# Altium PCB MicroD_MEC5_Adapter.PcbDoc
Units mm, origin at the board's own origin, x right, y up, seen from the top; angles counter-clockwise.
Board outline 25.4 x 24.5 mm, 2 copper layers (Top Layer, Bottom Layer); 2 components, 26 nets, 85 pads, 21 vias.
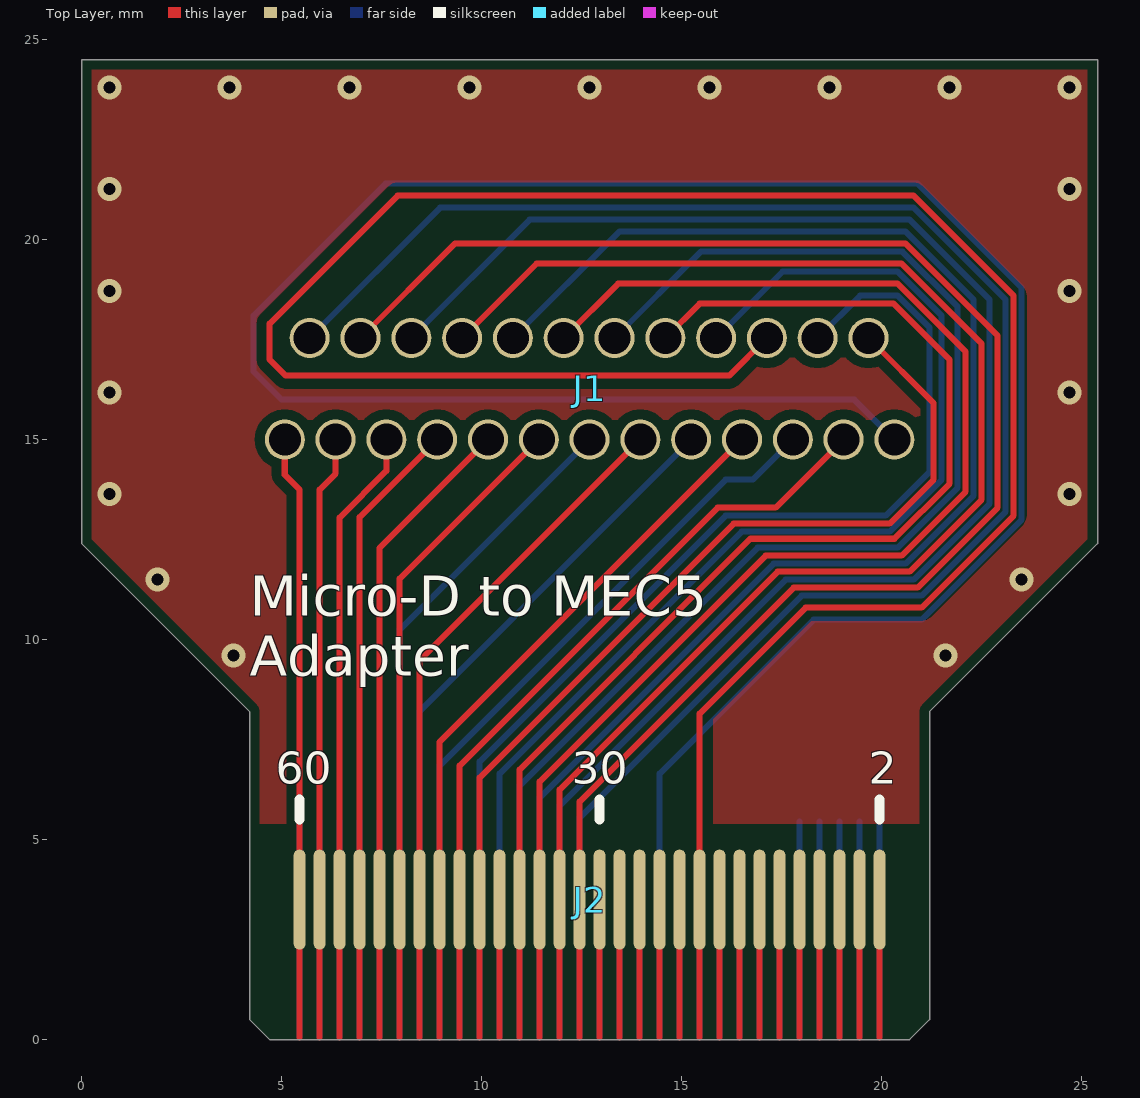
[diagram p0: Top Layer view]
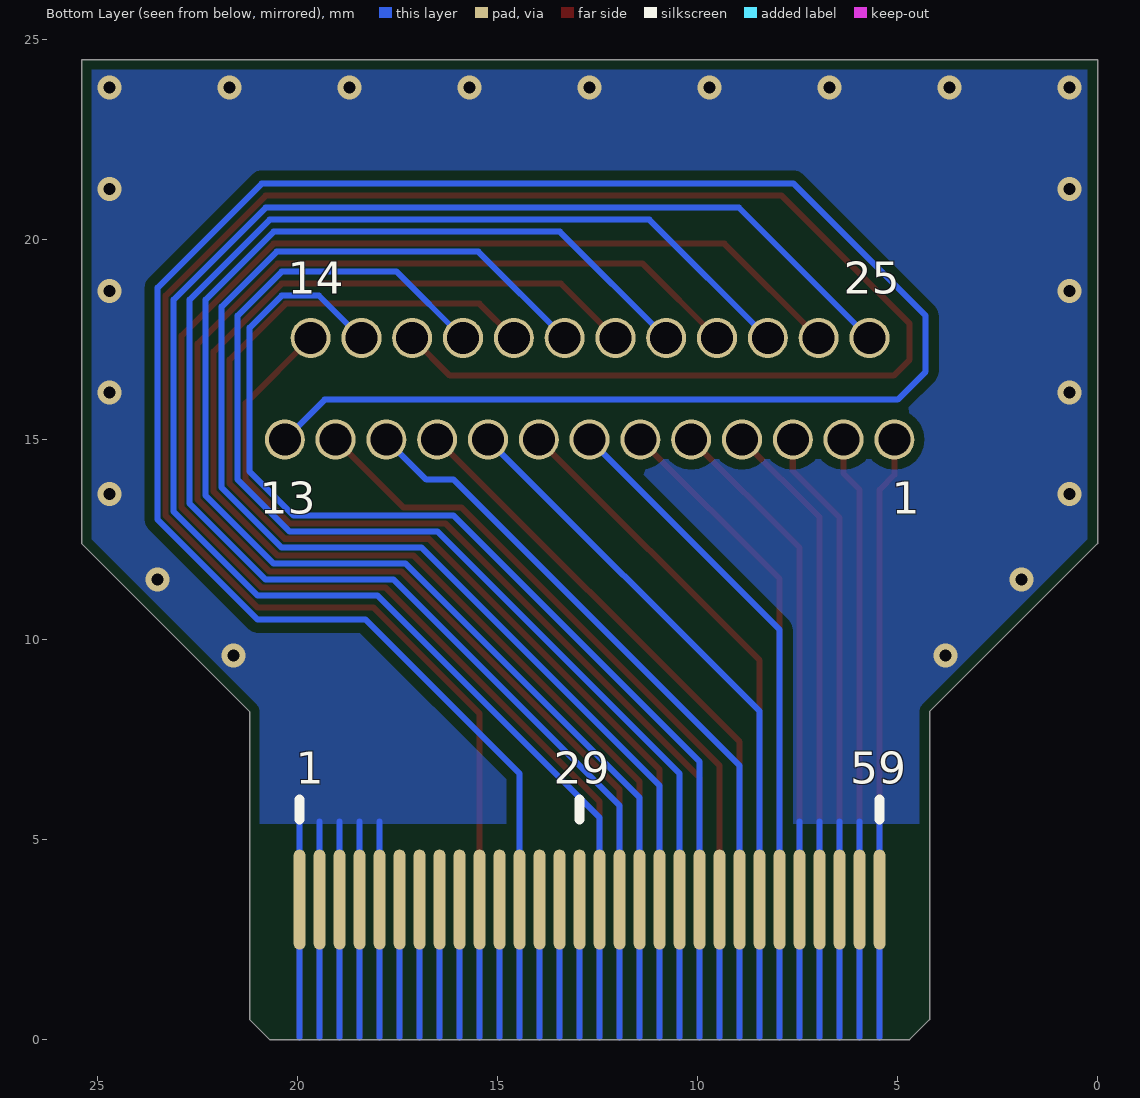
[diagram p1: Bottom Layer view, seen from below]

## Layer stack, top to bottom
Top Solder: solder mask 0.0102, Solder Resist, Dk 3.5
Top Layer: signal copper 0.0356
Dielectric 1: dielectric 0.32, FR-4, Dk 4.8
Bottom Layer: signal copper 0.0356
Bottom Solder: solder mask 0.0102, Solder Resist, Dk 3.5

## Board outline
21.2,0.5 20.7,0 4.7,0 4.2,0.5 4.2,8.2 0,12.4 0,24.5 25.4,24.5 25.4,12.4 21.2,8.2

## Design rules (kind name [scope] priority, off if disabled: settings)
BoardOutlineClearance [All] p1: gap=0.254 ignorepadtopadclearanceinfootprint=FALSE except(0: Arc-SplitContinuation Track-OutlineEdge Track-SplitContinuation SMDPad-SplitContinuation THPad-SplitContinuation Via-SplitContinuation Fill-OutlineEdge Fill-SplitContinuation Poly-SplitContinuation Region-SplitContinuation Text-SplitContinuation)
Clearance [All] p1: gap=0.254 ignorepadtopadclearanceinfootprint=FALSE except(0: Arc-Hole Track-Hole SMDPad-Hole THPad-Hole Via-Hole Fill-Hole Poly-Hole Region-Hole Text-Hole; 0.127: Arc-Arc Arc-Track Arc-SMDPad Track-Track Track-SMDPad SMDPad-SMDPad)
MinimumSolderMaskSliver [All] p1: minsoldermaskwidth=0
NetAntennae [All] p1: netantennaetolerance=4
PolygonConnect [All] p1: connectstyle=Direct reliefconductorwidth=0.254 reliefentries=4 polygonreliefangle="90 Angle" airgapwidth=0.254
RoutingVias [All] p1: holewidth=0.711 width=1.27 viastyle="Through Hole" minholewidth=0.711 minwidth=1.27 maxholewidth=0.711 maxwidth=1.27
SilkToSilkClearance [All] p1: silktosilkclearance=0.15
SolderMaskExpansion [All] p1: expansion=0.102 istentingtop=FALSE
Width [All] p1: maxlimit=0.254 minlimit=0.127 preferedwidth=0.152
27 further rules are at their usual default settings.

## Components (designator, comment, footprint, x,y, rotation, side; value= is the part's Value field where it differs from the comment)
J1 "MICRO_DSUB_25" 581-M25-213L461 12.7,15 r180 top
J2 "EDGE_CONN_60" EDGE_CONN_60 12.7,3.5 r180 top locked

## Footprints (in the part's own frame and the unit in brackets; to place one, negate y for a bottom-side part, rotate by r counter-clockwise, add the part's x,y. Pads: shape width x height; smd on the part's side, far side on the other; paste and mask are expansions set on the pad)
581-M25-213L461 [mm] "CONN MICRO-D FEMALE 25P RA"
  round 1 hole 0.8: 1(7.62,0) 2(6.35,0) 3(5.08,0) 4(3.81,0) 5(2.54,0) 6(1.27,0) 7(0,0) 8(-1.27,0) 9(-2.54,0) 10(-3.81,0) 11(-5.08,0) 12(-6.35,0) 13(-7.62,0) 14(-6.973,-2.54) 15(-5.703,-2.54) 16(-4.433,-2.54) 17(-3.163,-2.54) 18(-1.893,-2.54) 19(-0.623,-2.54) 20(0.647,-2.54) 21(1.917,-2.54) 22(3.187,-2.54) 23(4.457,-2.54) 24(5.727,-2.54) 25(6.997,-2.54)
  body extent -15.07,-14.67 15.03,0.88, height 7.9
EDGE_CONN_60 [mm]
  oval 0.3x2.5 smd far side: 1(-7.25,0) 3(-6.75,0) 5(-6.25,0) 7(-5.75,0) 9(-5.25,0) 11(-4.75,0) 13(-4.25,0) 15(-3.75,0) 17(-3.25,0) 19(-2.75,0) 21(-2.25,0) 23(-1.75,0) 25(-1.25,0) 27(-0.75,0) 29(-0.25,0) 31(0.25,0) 33(0.75,0) 35(1.25,0) 37(1.75,0) 39(2.25,0) 41(2.75,0) 43(3.25,0) 45(3.75,0) 47(4.25,0) 49(4.75,0) 51(5.25,0) 53(5.75,0) 55(6.25,0) 57(6.75,0) 59(7.25,0)
  oval 0.3x2.5 smd: 2(-7.25,0) 4(-6.75,0) 6(-6.25,0) 8(-5.75,0) 10(-5.25,0) 12(-4.75,0) 14(-4.25,0) 16(-3.75,0) 18(-3.25,0) 20(-2.75,0) 22(-2.25,0) 24(-1.75,0) 26(-1.25,0) 28(-0.75,0) 30(-0.25,0) 32(0.25,0) 34(0.75,0) 36(1.25,0) 38(1.75,0) 40(2.25,0) 42(2.75,0) 44(3.25,0) 46(3.75,0) 48(4.25,0) 50(4.75,0) 52(5.25,0) 54(5.75,0) 56(6.25,0) 58(6.75,0) 60(7.25,0)
  Top Layer lines w0.152: 7.25,3.45 7.25,0 ; 6.75,3.45 6.75,0 ; 6.25,3.45 6.25,0 ; 5.75,3.45 5.75,0 ; 5.25,3.45 5.25,0 ; 4.75,3.45 4.75,0 ; 4.25,3.45 4.25,0 ; 3.75,3.45 3.75,0 ; 3.25,3.45 3.25,0 ; 2.75,3.45 2.75,0 ; 2.25,3.45 2.25,0 ; 1.75,3.45 1.75,0 ; 1.25,3.45 1.25,0 ; 0.75,3.45 0.75,0 ; 0.25,3.45 0.25,0 ; -0.25,3.45 -0.25,0 ; -0.75,3.45 -0.75,0 ; -1.25,3.45 -1.25,0 ; -1.75,3.45 -1.75,0 ; -2.25,3.45 -2.25,0 ; -2.75,3.45 -2.75,0 ; -3.25,3.45 -3.25,0 ; -3.75,3.45 -3.75,0 ; -4.25,3.45 -4.25,0 ; -4.75,3.45 -4.75,0 ; -5.25,3.45 -5.25,0 ; -5.75,3.45 -5.75,0 ; -6.25,3.45 -6.25,0 ; -6.75,3.45 -6.75,0 ; -7.25,3.45 -7.25,0
  Bottom Layer lines w0.152: 7.25,3.45 7.25,0 ; 6.75,3.45 6.75,0 ; 6.25,3.45 6.25,0 ; 5.75,3.45 5.75,0 ; 5.25,3.45 5.25,0 ; 4.75,3.45 4.75,0 ; 4.25,3.45 4.25,0 ; 3.75,3.45 3.75,0 ; 3.25,3.45 3.25,0 ; 2.75,3.45 2.75,0 ; 2.25,3.45 2.25,0 ; 1.75,3.45 1.75,0 ; 1.25,3.45 1.25,0 ; 0.75,3.45 0.75,0 ; 0.25,3.45 0.25,0 ; -0.25,3.45 -0.25,0 ; -0.75,3.45 -0.75,0 ; -1.25,3.45 -1.25,0 ; -1.75,3.45 -1.75,0 ; -2.25,3.45 -2.25,0 ; -2.75,3.45 -2.75,0 ; -3.25,3.45 -3.25,0 ; -3.75,3.45 -3.75,0 ; -4.25,3.45 -4.25,0 ; -4.75,3.45 -4.75,0 ; -5.25,3.45 -5.25,0 ; -5.75,3.45 -5.75,0 ; -6.25,3.45 -6.25,0 ; -6.75,3.45 -6.75,0 ; -7.25,3.45 -7.25,0

## Part data
J1: "Micro D-Sub 25 pin connector"
J2: "Card edge connector 60-pin"

## Via types
v1: diameter 0.6, hole 0.3, Top Layer to Bottom Layer, 21 vias

## Nets (pads, with @x,y where several pads share a name; then routed paths per layer and width w, separated by ;. In a path a pad name is that pad's centre, name@x,y a point inside that pad or via, vN(x,y) a via of type N, cw(c..) or ccw(c..) an arc to the next point about the centre after c; other vN are vias at no path point)
DSUB_1: J1.1 J2.60 | length 11.7
  Top Layer w0.152: J1.1 5.08,14.12 5.45,13.75 J2.60
DSUB_2: J1.2 J2.58 | length 11.7
  Top Layer w0.152: J2.58 5.95,13.75 6.35,14.15 J1.2
DSUB_3: J1.3 J2.56 | length 12
  Top Layer w0.152: J2.56 6.45,13.05 7.62,14.22 J1.3
DSUB_4: J1.4 J2.54 | length 12.3
  Top Layer w0.152: J2.54 6.95,13.06 J1.4
DSUB_5: J1.5 J2.52 | length 12.6
  Top Layer w0.152: J2.52 7.45,12.29 J1.5
DSUB_6: J1.6 J2.50 | length 12.9
  Top Layer w0.152: J2.50 7.95,11.52 J1.6
DSUB_7: J1.7 J2.49 | length 13.5
  Bottom Layer w0.152: J2.49 7.95,10.25 J1.7
DSUB_8: J1.8 J2.48 | length 13.8
  Top Layer w0.152: J2.48 8.45,9.48 J1.8
DSUB_9: J1.9 J2.47 | length 14.3
  Bottom Layer w0.152: J2.47 8.45,8.21 J1.9
DSUB_10: J1.10 J2.46 | length 14.6
  Top Layer w0.152: J2.46 8.95,7.44 J1.10
DSUB_11: J1.11 J2.45 | length 15.6
  Bottom Layer w0.152: J2.45 8.95,6.85 16.1,14 16.78,14 J1.11
DSUB_12: J1.12 J2.44 | length 16.3
  Top Layer w0.152: J2.44 9.45,6.85 15.9,13.3 17.35,13.3 J1.12
DSUB_13: J1.13 J2.23 | length 60.4
  Bottom Layer w0.152: J2.23 14.45,6.65 18.3,10.5 21,10.5 23.5,13 23.5,18.8 20.9,21.4 7.6,21.4 4.3,18.1 4.3,16.7 5,16 19.32,16 J1.13
DSUB_14: J1.14 J2.42 | length 21.7
  Top Layer w0.152: J2.42 9.95,6.55 16.3,12.9 20.2,12.9 21.3,14 21.3,15.913 J1.14
DSUB_15: J1.15 J2.41 | length 24.9
  Bottom Layer w0.152: J2.41 9.95,6.95 16.1,13.1 20.1,13.1 21.2,14.2 21.2,17.8 20.4,18.6 19.464,18.6 J1.15
DSUB_16: J1.16 J2.20 | length 54.9
  Top Layer w0.152: J2.20 15.45,8.15 18.1,10.8 21,10.8 23.3,13.1 23.3,18.6 20.8,21.1 7.9,21.1 4.7,17.9 4.7,17 5.1,16.6 16.194,16.6 J1.16
DSUB_17: J1.17 J2.39 | length 28.1
  Bottom Layer w0.152: J2.39 10.45,6.65 16.5,12.7 20.2,12.7 21.5,14 21.5,18.1 20.4,19.2 17.524,19.2 J1.17
DSUB_18: J1.18 J2.38 | length 28.1
  Top Layer w0.152: J2.38 10.95,6.75 16.721,12.521 20.321,12.521 21.7,13.9 21.7,17 20.3,18.4 15.454,18.4 J1.18
DSUB_19: J1.19 J2.37 | length 31.5
  Bottom Layer w0.152: J2.37 10.95,6.35 16.9,12.3 20.4,12.3 21.9,13.8 21.9,18.322 20.522,19.7 15.484,19.7 J1.19
DSUB_20: J1.20 J2.36 | length 31.4
  Top Layer w0.152: J2.36 11.45,6.45 17.1,12.1 20.5,12.1 22.1,13.7 22.1,17.2 20.4,18.9 13.414,18.9 J1.20
DSUB_21: J1.21 J2.35 | length 34.8
  Bottom Layer w0.152: J1.21 13.444,20.2 20.6,20.2 22.3,18.5 22.3,13.6 20.6,11.9 17.3,11.9 11.45,6.05 J2.35
DSUB_22: J1.22 J2.34 | length 34.8
  Top Layer w0.152: J1.22 11.374,19.4 20.5,19.4 22.5,17.4 22.5,13.5 20.7,11.7 17.4,11.7 11.95,6.25 J2.34
DSUB_23: J1.23 J2.33 | length 37.8
  Bottom Layer w0.152: J1.23 11.204,20.5 20.7,20.5 22.7,18.5 22.7,13.4 20.8,11.5 17.6,11.5 11.95,5.85 J2.33
DSUB_24: J1.24 J2.32 | length 38.1
  Top Layer w0.152: J1.24 9.334,19.9 20.6,19.9 22.9,17.6 22.9,13.3 20.9,11.3 17.8,11.3 12.45,5.95 J2.32
DSUB_25: J1.25 J2.31 | length 40.9
  Bottom Layer w0.152: J1.25 8.964,20.8 20.8,20.8 23.1,18.5 23.1,13.2 21,11.1 18,11.1 12.45,5.55 J2.31
GND: J2.1 J2.3 J2.5 J2.7 J2.9 J2.51 J2.53 J2.55 J2.57 J2.59 | length 19.5
  Bottom Layer w0.152: J2.59 5.45,5.45 ; J2.57 5.95,5.45 ; J2.55 6.45,5.45 ; J2.53 6.95,5.45 ; J2.51 7.45,5.45 ; J2.9 17.95,5.45 ; J2.7 18.45,5.45 ; J2.5 18.95,5.45 ; J2.3 19.45,5.45 ; J2.1 19.95,5.45
  other v1: 3.8,9.6 21.6,9.6 1.9,11.5 23.5,11.5 0.7,13.64 24.7,13.64 0.7,16.18 24.7,16.18 0.7,18.72 24.7,18.72 0.7,21.26 24.7,21.26 0.7,23.8 3.7,23.8 6.7,23.8 9.7,23.8 12.7,23.8 15.7,23.8 18.7,23.8 21.7,23.8 24.7,23.8
pads on no net: J2.2 J2.4 J2.6 J2.8 J2.10 J2.11 J2.12 J2.13 J2.14 J2.15 J2.16 J2.17 J2.18 J2.19 J2.21 J2.22 J2.24 J2.25 J2.26 J2.27 J2.28 J2.29 J2.30 J2.40 J2.43

## Polygon pours and split planes (outlines as drawn)
GND on Bottom Layer "POLY_GND_BOTTOM" (solid, remove dead copper, pour order 5): 0,24.5 25.4,24.5 25.4,5.4 0,5.4
GND on Top Layer "POLY_GND_TOP" (solid, remove dead copper, pour order 4): 0,24.5 25.4,24.5 25.4,5.4 0,5.4

## Other copper
Top Layer:
  pour cut-out: 2.3,19.3

## Silkscreen, mask and mechanical layers (free items; w line width, h text height)
Top Overlay:
  lines w0.254: 5.45,5.5 5.45,6 ; 12.95,5.5 12.95,6 ; 19.95,5.5 19.95,6
  text "Micro-D to MEC5 / Adapter" at 4.2,9.1 h1
  text "60" at 4.85,6.4 h0.8
  text "30" at 12.251,6.399 h0.8
  text "2" at 19.675,6.4 h0.8
Bottom Overlay:
  lines w0.254: 5.45,5.5 5.45,6 ; 12.95,5.5 12.95,6 ; 19.95,5.5 19.95,6
  text "25" at 6.35,18.65 h0.8
  text "14" at 20.25,18.65 h0.8
  text "1" at 5.15,13.15 h0.8
  text "13" at 20.95,13.15 h0.8
  text "59" at 6.183,6.4 h0.8
  text "29" at 13.6,6.4 h0.8
  text "1" at 20.05,6.4 h0.8
Top Solder:
  rectangle: 24.2,12.4 25.4,24.5
  rectangle: 0,12.4 1.2,24.5
  rectangle: 0,23.3 25.4,24.5
  rectangle: 4.2,0 21.2,5.3
  region: 20.4,9 24.6,13.2 25.4,12.4 21.2,8.2
  region: 0,12.4 0.8,13.2 5,9 4.2,8.2
Bottom Solder:
  rectangle: 24.2,12.4 25.4,24.5
  rectangle: 0,12.4 1.2,24.5
  rectangle: 0,23.3 25.4,24.5
  rectangle: 4.2,0 21.2,5.3
  region: 20.4,9 24.6,13.2 25.4,12.4 21.2,8.2
  region: 0,12.4 0.8,13.2 5,9 4.2,8.2
Mechanical 1:
  the board outline again, w0.05